# EAGLE board Andrzej Fidos Arbeidskrav Dataelektornikk 10 November 2023 (EAGLE 9.7.0)

Size 88.18 x 112.65 mm. Coordinates in mm from the lower left corner, seen from the top.
Outline: 0,0 88.19,0 88.19,112.65 0,112.65 0,0
Copper layers (1*16): Top 0.035mm / dielectric 1.5mm / Bottom 0.035mm
Design rules "default": minimum track width 6mil, minimum drill 0.35mm, track to track 6mil, track to pad 6mil, pad to pad 6mil, via to via 6mil, smd to smd 6mil, copper to edge 40mil, drill to drill 6mil, minimum pad ring 10mil, minimum via ring 8mil, stop-mask expansion 4mil, vias tented up to drill 0mil, thermal gap 10mil

## Footprints (pad centres in the part's own frame; a part is rotated, then mirrored left to right if it is on the bottom)
LEDRD254W60D565H860B_B = drill 0.981 pad 1.581: 1 -1.27,0; 2 1.27,0
RESAD1016W63L850D250B = drill 0.83 pad 1.43: 1 -5.08,0; 2 5.08,0
SWITCH-MOMENTARY-PTH-6.5MM = drill 1.016 pad 1.88: 1 -3.251,2.261; 2 3.251,2.261; 3 -3.251,-2.261; 4 3.251,-2.261
ARDUINO-UNO-R3-SHIELD = drill 1.016 pad 1.88: 3.3V 24.13,-2.54; 5V 24.13,0; A0 24.13,12.7; A1 24.13,15.24; A2 24.13,17.78; A3 24.13,20.32; A4 24.13,22.86; A5 24.13,25.4; AREF -24.13,-13.97; D2 -24.13,20.32; D3 -24.13,17.78; D4 -24.13,15.24; D5 -24.13,12.7; D6 -24.13,10.16; D7 -24.13,7.62; D8 -24.13,3.81; D9 -24.13,1.27; D10 -24.13,-1.27; D11 -24.13,-3.81; D12 -24.13,-6.35; D13 -24.13,-8.89; GND@0 24.13,2.54; GND@1 24.13,5.08; GND@2 -24.13,-11.43; IOREF 24.13,-7.62; NC 24.13,-10.16; RES 24.13,-5.08; RX -24.13,25.4; SCL -24.13,-19.05; SDA -24.13,-16.51; TX -24.13,22.86; VIN 24.13,7.62

## Placement (x,y rotation side)
D1  BLUE  [LEDRD254W60D565H860B_B]  80.58,96.06 180 top
D2  BLUE  [LEDRD254W60D565H860B_B]  75.5,96.06 180 top
D3  BLUE  [LEDRD254W60D565H860B_B]  70.42,96.06 180 top
D4  BLUE  [LEDRD254W60D565H860B_B]  65.34,96.06 180 top
D5  BLUE  [LEDRD254W60D565H860B_B]  60.26,96.06 180 top
D6  BLUE  [LEDRD254W60D565H860B_B]  55.18,96.06 180 top
D7  BLUE  [LEDRD254W60D565H860B_B]  50.1,96.06 180 top
D8  BLUE  [LEDRD254W60D565H860B_B]  45.02,96.06 180 top
R1  1k  [RESAD1016W63L850D250B]  13.27,68.12 270 top
R2  1k  [RESAD1016W63L850D250B]  20.89,68.12 90 top
R3  1k  [RESAD1016W63L850D250B]  28.51,68.12 90 top
R4  1k  [RESAD1016W63L850D250B]  36.13,68.12 90 top
R5  300  [RESAD1016W63L850D250B]  81.85,90.98 90 top
R6  300  [RESAD1016W63L850D250B]  76.77,90.98 90 top
R7  300  [RESAD1016W63L850D250B]  71.69,90.98 90 top
R8  300  [RESAD1016W63L850D250B]  66.61,90.98 90 top
R9  300  [RESAD1016W63L850D250B]  61.53,90.98 90 top
R10  300  [RESAD1016W63L850D250B]  56.45,90.98 90 top
R11  300  [RESAD1016W63L850D250B]  51.37,90.98 90 top
R12  300  [RESAD1016W63L850D250B]  46.29,90.98 90 top
R13  1k  [RESAD1016W63L850D250B]  43.75,68.12 90 top
R14  1k  [RESAD1016W63L850D250B]  10.73,68.12 90 top
R15  1k  [RESAD1016W63L850D250B]  41.21,103.68 90 top
SBUTTON1  SWITCH_MOMENTARY  [SWITCH-MOMENTARY-PTH-6.5MM]  33.59,84.63 90 top
SBUTTON2  SWITCH_MOMENTARY  [SWITCH-MOMENTARY-PTH-6.5MM]  25.97,84.63 90 top
SBUTTON3  SWITCH_MOMENTARY  [SWITCH-MOMENTARY-PTH-6.5MM]  18.35,79.55 90 top
SBUTTON4  SWITCH_MOMENTARY  [SWITCH-MOMENTARY-PTH-6.5MM]  10.73,79.55 90 top
SBUTTON5  SWITCH_MOMENTARY  [SWITCH-MOMENTARY-PTH-6.5MM]  10.73,92.25 90 top
SBUTTON6  SWITCH_MOMENTARY  [SWITCH-MOMENTARY-PTH-6.5MM]  36.13,94.79 90 top
U1  ARDUINO-UNO-R3-SHIELD  [ARDUINO-UNO-R3-SHIELD]  47.88,29.84 270 top

## Library data of the parts
D1-D8 = Tinkercad; CATEGORY: Opto-Electronic; SUB-CATEGORY: LED; VALUE: LED_BLUE
R1-R15 SBUTTON1-SBUTTON6 U1 = Tinkercad

## Nets
D1_A: D1.1 R5.2
D2_A: D2.1 R6.2
D3_A: D3.1 R7.2
D4_A: D4.1 R8.2
D5_A: D5.1 R9.2
D6_A: D6.1 R10.2
D7_A: D7.1 R11.2
D8_A: D8.1 R12.2
U1_5V: R1.1 R2.2 R3.2 R4.2 R13.2 R14.2 SBUTTON1.3 SBUTTON1.4 SBUTTON2.3 SBUTTON2.4 SBUTTON3.3 SBUTTON3.4 SBUTTON4.3 SBUTTON4.4 SBUTTON5.3 SBUTTON5.4 SBUTTON6.3 SBUTTON6.4 U1.5V
U1_A0: SBUTTON5.1 SBUTTON5.2 U1.A0
U1_A1: SBUTTON6.1 SBUTTON6.2 U1.A1
U1_D2: R5.1 U1.D2
U1_D3: R6.1 U1.D3
U1_D4: R7.1 U1.D4
U1_D5: R8.1 U1.D5
U1_D6: R9.1 U1.D6
U1_D7: R10.1 U1.D7
U1_D8: R11.1 U1.D8
U1_D9: R12.1 U1.D9
U1_D10: SBUTTON1.1 SBUTTON1.2 U1.D10
U1_D11: SBUTTON2.1 SBUTTON2.2 U1.D11
U1_D12: SBUTTON3.1 U1.D12
U1_D13: SBUTTON4.1 U1.D13
U1_GND: D1.2 D2.2 D3.2 D4.2 D5.2 D6.2 D7.2 D8.2 R1.2 R2.1 R3.1 R4.1 R13.1 R14.1 R15.2 U1.GND@0 U1.GND@1 U1.GND@2

## Tracks (layer width: path | path; a pad name or v marks a point on that pad's centre or on a via)
D1_A  (1 unrouted)
D2_A  (1 unrouted)
D3_A  (1 unrouted)
D4_A  (1 unrouted)
D5_A  (1 unrouted)
D6_A  (1 unrouted)
D7_A  (1 unrouted)
D8_A  (1 unrouted)
U1_5V  (18 unrouted)
U1_A0  (2 unrouted)
U1_A1  (2 unrouted)
U1_D2  (1 unrouted)
U1_D3  (1 unrouted)
U1_D4  (1 unrouted)
U1_D5  (1 unrouted)
U1_D6  (1 unrouted)
U1_D7  (1 unrouted)
U1_D8  (1 unrouted)
U1_D9  (1 unrouted)
U1_D10  (2 unrouted)
U1_D11  (2 unrouted)
U1_D12  (1 unrouted)
U1_D13  (1 unrouted)
U1_GND  (17 unrouted)